# Altium PCB 9101带功放(AD).PcbDoc
Units mil, origin at the board's own origin, x right, y up, seen from the top; angles counter-clockwise.
Board outline 938 x 850 mil, 2 copper layers (Top Layer, Bottom Layer); 20 components, 24 nets, 94 pads, 23 vias.
Unrouted connection lines stored in the file: 2.
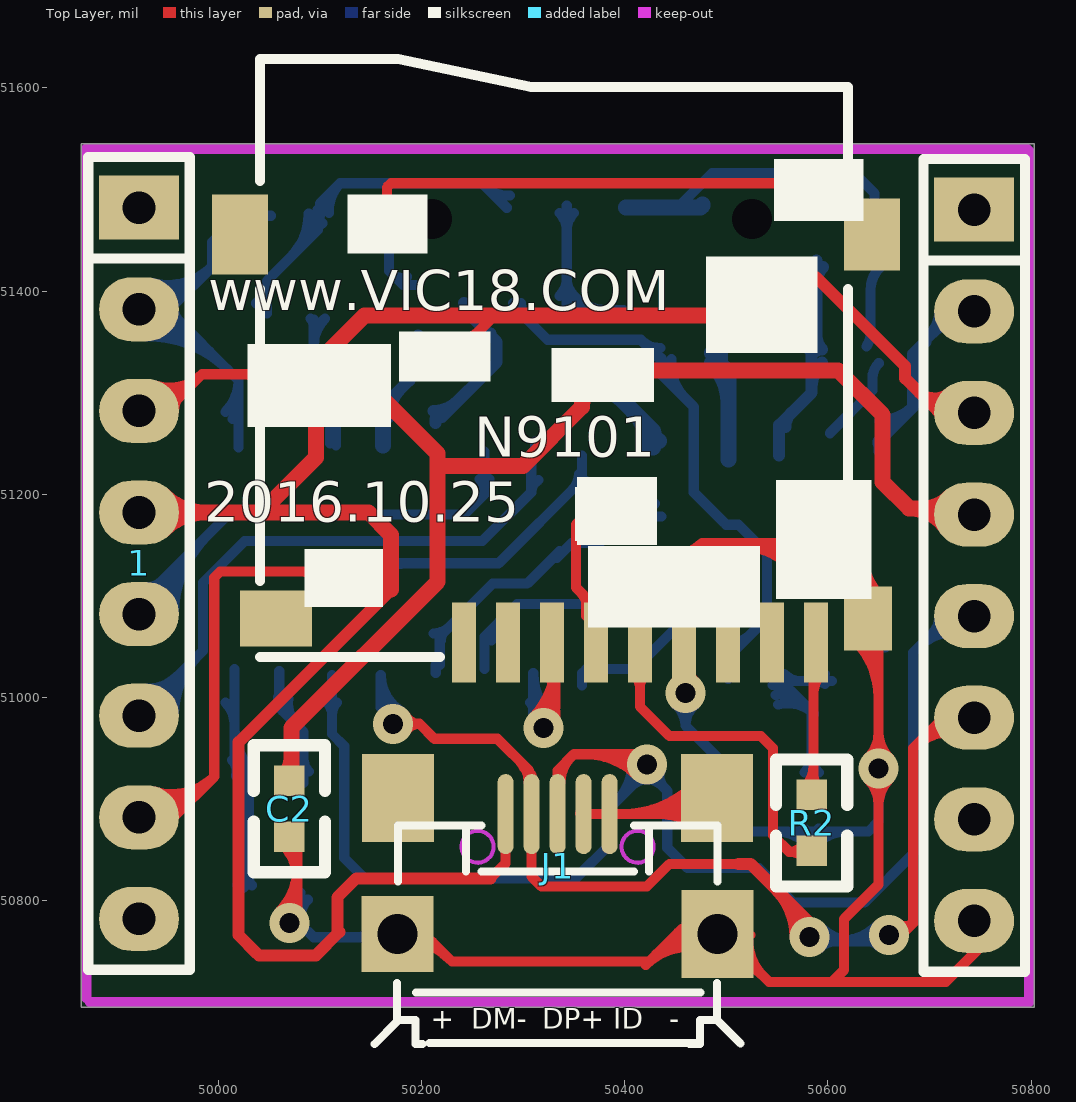
[diagram p0: Top Layer view]
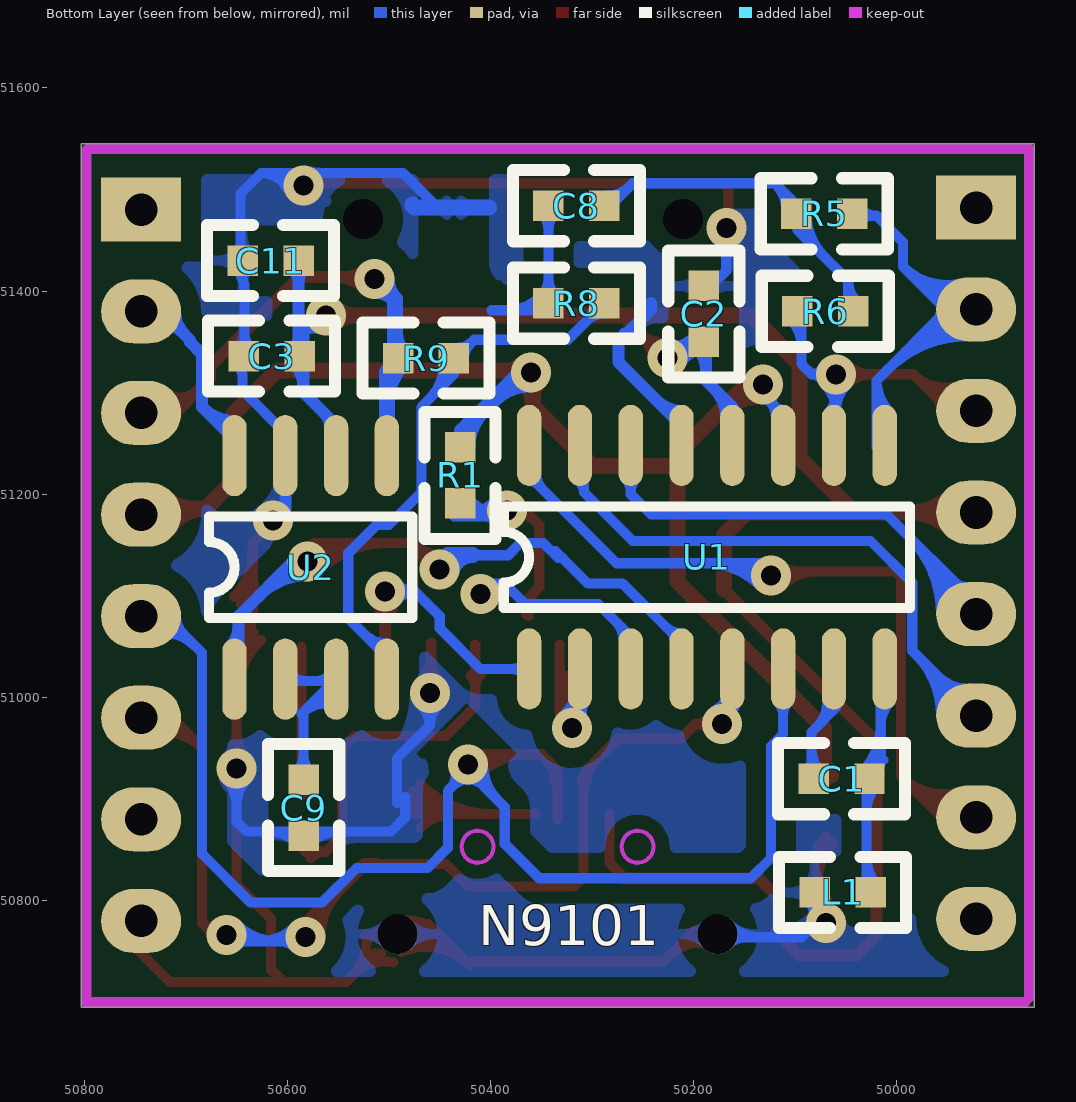
[diagram p1: Bottom Layer view, seen from below]

## Layer stack, top to bottom
Top Layer: signal copper 1.4
Dielectric: dielectric 12.6, FR-4, Dk 4.8
Bottom Layer: signal copper 1.4

## Board outline
49865,50695 50803,50695 50803,51545 49865,51545

## Design rules (kind name [scope] priority, off if disabled: settings)
Clearance [All] p1: gap=7.87
PolygonConnect [All] p1: connectstyle=Relief reliefconductorwidth=10 reliefentries=4 polygonreliefangle="90 Angle"
RoutingPriority [All] p1: routingpriority=1
RoutingVias [All] p1: holewidth=20 width=50 viastyle="Through Hole" minholewidth=28 minwidth=50 maxholewidth=28 maxwidth=50
SilkscreenOverComponentPads [All] p1: minsilkscreentomaskgap=10
SolderMaskExpansion [All] p1: expansion=4
Width [All] p1: maxlimit=78.74 minlimit=78.74 preferedwidth=10
26 further rules are at their usual default settings.

## Components (designator, comment, footprint, x,y, rotation, side; value= is the part's Value field where it differs from the comment)
1 "" SIP8#1 49922,51482 r270 top locked
C1 "104" 0603 50082,50920 r180 bottom
C2 "105" 0603 50190,51350 r90 bottom
C2 "105" 0603 50070,50918 r270 top
C3 "105" 0603 50588,51336 r0 bottom
C8 "105" 0603 50288,51484 r0 bottom
C9 "105" 0603 50584,50864 r90 bottom
C11 "104" 0603 50644,51430 r180 bottom
J1 "USB" USB-ANZUO 50334,50834 r180 top locked
L1 "100M600R" 0603 50026,50808 r0 bottom
R1 "4R7" 0603 50430,51246 r270 bottom
R2 "3K3" 0603 50584,50904 r270 top
R5 "4K7" 0603 50044,51476 r0 bottom
R6 "4K7" 0603 50098,51380 r180 bottom
R8 "4K7" 0603 50288,51388 r0 bottom
R9 "22k" 0603 50436,51334 r0 bottom
U1 "" SO-16 50362,51028 r90 bottom
U2 "8002" SO-8 50652,51018 r90 bottom
? "" SIP8#2 50744,51480 r270 top locked
? "TF" SD_TF 49928,51828 r180 top locked

## Footprints (in the part's own frame and the unit in brackets; to place one, negate y for a bottom-side part, rotate by r counter-clockwise, add the part's x,y. Pads: shape width x height; smd on the part's side, far side on the other; paste and mask are expansions set on the pad)
0603 [mil]
  rect 30x30 smd: 1(0,0) 2(55,0)
  silkscreen extent -35,-35 90,35
SD_TF [mm]
  rect 1.4x1.8 smd: 1(-18.169,9.459)
  rect 1.4x2 smd: 2(-2.369,9.459)
  rect 1.2x1.6 smd: 3(-18.069,19.059)
  rect 1.8x1.4 smd: 4(-3.269,19.059)
  rect 0.6x2 smd: 5(-16.769,19.659) 6(-15.669,19.659) 7(-14.569,19.659) 8(-13.469,19.659) 9(-12.369,19.659) 10(-11.269,19.659) 11(-10.169,19.659) 12(-9.069,19.659) 13(-7.969,19.659)
  round 0 hole 1: 14(-15.175,9.073) 15(-7.175,9.073)
  silkscreen extent -17.57,5.07 -2.87,20.02
SIP8#1 [mm]
  rect 1.6x2 hole 0.813: 1(0,0)
  oval 1.6x2 hole 0.813: 2(2.54,0) 3(5.08,0) 4(7.62,0) 5(10.16,0) 6(12.7,0) 7(15.24,0) 8(17.78,0)
  silkscreen extent -1.27,-1.27 19.05,1.27
SIP8#2 [mm]
  oval 1.6x2 hole 0.813: 16(17.78,0) 17(15.24,0) 18(12.7,0) 19(10.16,0) 20(7.62,0) 21(5.08,0) 22(2.54,0)
  rect 1.6x2 hole 0.813: 23(0,0)
  silkscreen extent -1.27,-1.27 19.05,1.27
SO-8 [mil]
  oval 80x24 smd: 1(0,0) 2(0,-50) 3(0,-100) 4(0,-150) 5(220,-150) 6(220,-100) 7(220,-50) 8(220,0)
  silkscreen extent 60,-175 160,25
SO-16 [mil]
  oval 80x24 smd: 1(0,0) 2(0,-50) 3(0,-100) 4(0,-150) 5(0,-200) 6(0,-250) 7(0,-300) 8(0,-350) 9(220,-350) 10(220,-300) 11(220,-250) 12(220,-200) 13(220,-150) 14(220,-100) 15(220,-50) 16(220,0)
  silkscreen extent 60,-375 160,25
USB-ANZUO [mm]
  rect 1.8x2.2 smd: 0(-4,1.702) 0(-3.981,-1.702) 0(3.995,-1.702)
  rect 1.8x1.9 smd: 0(4,1.702)
  round 1 hole 1: 1(-4,1.702) 2(4,1.702)
  oval 0.4x2 smd: 1(-1.3,-1.298) 2(-0.65,-1.298) 3(0,-1.298) 4(0.65,-1.298) 5(1.3,-1.298)
  Keep-Out Layer circle w0.102: c-2,-0.483 r0.4
  Keep-Out Layer circle w0.102: c2,-0.483 r0.4
  silkscreen extent -4.57,-1.01 4.57,4.45

## Via types
v1: diameter 39.37, hole 19.68, Top Layer to Bottom Layer, 23 vias

## Nets (pads, with @x,y where several pads share a name; then routed paths per layer and width w, separated by ;. In a path a pad name is that pad's centre, name@x,y a point inside that pad or via, vN(x,y) a via of type N, cw(c..) or ccw(c..) an arc to the next point about the centre after c; other vN are vias at no path point)
3.3V: ?.20 C2.1@50070,50918 R1.1 U1.11 | length 1807.7
  Top Layer w10: v1(50132,51308) v1@50135.79,51304.21 ; 50216,51228 50224,51228
  Top Layer w15.75: C2.1@50064.96,50923.04 ccw(c50047.97,50940.03) 50072,50940.03 ; C2.1@50072,50918 50072,50970 50216,51114 50216,51240 50151.79,51304.21 ; v1@50132,51296.19 cw(c50132,51229.05) 50179.48,51276.52 ; v1@50132,51311.94 cw(c50132,51282.81) 50152.59,51303.41 ; v1@50135.79,51304.21 50151.79,51304.21 ; v1@50138.63,51298.22 cw(c50147.99,51284.42) 50159.78,51296.21 ; v1@50140.35,51299.65 cw(c50151.37,51288.62) 50151.37,51304.21 ; v1@50143.48,51310.76 ccw(c50151.79,51312.75) 50151.79,51304.21 ; 50224,51228 50300,51228 50358,51286 v1@50358,51318 ; v1@50351.65,51311.65 cw(c50336.31,51296.31) 50358,51296.31 ; 50358,51286.66 cw(c50393.34,51286.66) 50368.35,51311.65 cw(c50393.34,51286.66) 50393.34,51322 ; v1@50364,51322 50610,51322 50654,51278 50654,51212 50680,51186 ; v1@50368.35,51328.35 ccw(c50383.68,51343.68) 50383.68,51322 ; 50693.58,51186 ccw(c50693.58,51222.54) ?.20@50719.42,51196.7 ; ?.20@50716.62,51166.67 ccw(c50680,51141.64) 50680,51186 ; ?.20@50744,51186 50680,51186
  Bottom Layer w10: U1.11@50110,51250 U1.11@50110,51264 ; U1.11@50112,51283 ccw(c50112,51295.07) 50120.54,51286.54 ; U1.11@50116,51248 50116,51282 v1@50136,51302 ; U1.11@50119,51276 cw(c50140.73,51276) v1@50125.36,51291.36 ; 50121,51287 ccw(c50115.37,51292.63) v1@50121.22,51298.03 ; v1@50368,51320 v1@50370,51320
  Bottom Layer w15.75: v1@50360,51308.19 cw(c50360,51255.53) 50397.23,51292.77 ; v1@50362,51322 50368,51322 50428,51262 ; 50407.93,51282.06 cw(c50371.87,51246) R1.1@50422.87,51246 ; 50421,51269 cw(c50409.39,51257.39) R1.1@50423.76,51249.45 ; R1.1@50428,51246 50428,51262 ; R1.1@50433.63,51252.13 cw(c50439.46,51262) 50428,51262
  other v1: 50360,51320
AGND: C1.2 L1.1 U1.8 | length 428.5
  Bottom Layer w10: U1.8@50007.05,50995.05 cw(c49985.44,50973.44) 50016,50973.44 ; 50013.5,50938.5 cw(c50002.41,50927.41) C1.2@50017.42,50922.89 ; 50016,50946.56 ccw(c50053.56,50946.56) C1.2 ; 50016,50970.7 ccw(c50077.7,50970.7) C1.2@50034.07,50927.07 ; U1.8@50016,51028 50016,50936 50030,50922 50030,50818 L1.1@50024,50812 ; C1.2@50018.46,50933.54 ccw(c50027,50942.07) C1.2@50027,50930 ; L1.1@50018.93,50815.07 ccw(c49992.2,50841.8) 50030,50841.8 ; C1.2@50019.93,50912.93 cw(c49995.61,50888.61) 50030,50888.61 ; L1.1@50030,50822.49 ccw(c50040.49,50822.49) L1.1@50033.07,50815.07 ; 50030,50903.1 cw(c50043.9,50903.1) C1.2@50034.07,50912.93
DACL: 1.2 R5.1 U1.9 | length 827.4
  Bottom Layer w10: 1.2 49950,51382 50020,51312 ; 1.2@49926,51386 49956,51386 49994,51424 ; 1.2@49929.87,51355.5 cw(c49929.87,51242.95) 50009.46,51322.54 ; 1.2@49929.87,51365.5 cw(c49929.87,51277.09) 49992.39,51339.61 ; 1.2@49929.87,51375.5 cw(c49929.87,51311.23) 49975.32,51356.68 ; 1.2@49931.41,51388.31 ccw(c49940.76,51426.87) 49968.81,51398.82 ; 1.2@49933.76,51398.03 ccw(c49945.68,51447.14) 49981.41,51411.41 ; 1.2@49936.12,51407.75 ccw(c49950.59,51467.4) 49994,51424 ; 1.2@49956.37,51382 ccw(c49971.75,51382) 49960.87,51371.13 ; U1.9@50007.07,51280.97 ccw(c49976.3,51312) 50020,51312 ; U1.9@50014.11,51273.87 ccw(c50000.1,51288) 50020,51288 ; U1.9@50020,51246 50020,51312 ; 50024.69,51474 cw(c50024.69,51456.69) R5.1@50036.93,51468.93 ; R5.1@50036,51482 cw(c50020,51494) 50020,51474 ; R5.1@50052,51474 50020,51474 ; 49994,51424 49994,51448 50020,51474
DACR: 1.3 R6.1 U1.10 | length 622.2
  Top Layer w10: 1.3 49948,51282 49984,51318 ; 1.3@49931.92,51288.17 ccw(c49940.9,51315.25) 49961.07,51295.07 ; 1.3@49935.06,51297.66 ccw(c49946.6,51332.47) 49972.54,51306.54 ; 1.3@49938.21,51307.15 ccw(c49952.31,51349.68) 49984,51318 ; 1.3@49956.37,51282 cw(c49976.58,51282) 49962.29,51296.29 ; v1@50049.62,51307.62 ccw(c50024.55,51282.55) 50024.55,51318 ccw(c50024.55,51353.45) v1@50049.62,51328.38 ; v1(50060,51318) 49984,51318
  Bottom Layer w10: v1@50049.62,51307.62 cw(c50024.55,51282.55) 50060,51282.55 cw(c50095.45,51282.55) v1@50070.38,51307.62 ; U1.10@50057.05,51280.95 ccw(c50049.93,51288.07) 50060,51288.07 ; U1.10@50060,51272 v1@50060,51316 ; 50060,51297.73 ccw(c50083.73,51297.73) U1.10@50066.95,51280.95 ; v1(50060,51318) 50084,51318 ; v1@50062,51314 v1@50064,51316 ; v1@50073.08,51311.32 cw(c50084,51305.73) 50084,51318 ; v1@50073.08,51324.68 ccw(c50084,51330.27) 50084,51318 ; R6.1@50090.93,51372.93 cw(c50083.51,51365.51) R6.1@50094,51365.51 ; 50094,51346.2 cw(c50131.8,51346.2) R6.1@50105.07,51372.93 ; R6.1@50094,51372 50094,51328 50084,51318
GND: ?.3 ?.8 ?.16 C2.2 C3.2 C9.1 C11.1 J1.0@50176.52,50767 J1.0@50490.72,50901 J1.0@50491.48,50767 J1.1 J1.2 L1.2 U1.13 U2.7 | length 4989.9
  Top Layer w10: v1@50059.62,50788.38 ccw(c50015.23,50832.77) 50078,50832.77 ; C2.2@50062.93,50855.93 cw(c50026.54,50819.54) 50078,50819.54 ; v1@50066.69,50781.31 ccw(c50039.38,50808.62) 50078,50808.62 ; C2.2@50068,50860 50072,50860 50078,50854 v1@50078,50780 ; C2.2@50070,50863 cw(c50050.69,50843.69) 50078,50843.69 ; v1@50166,51464 50166,51502 50170,51506 v1@50582,51506 ; J1.0@50174,50770 J1.0@50200,50770 ; J1.0@50176.27,50772.31 cw(c50178.43,50725.99) J1.0@50211.22,50758.78 ; J1.0@50176.68,50764.64 cw(c50189.26,50734.3) 50212.48,50757.52 ; J1.0@50176.74,50762.32 cw(c50179.85,50695.4) 50227.23,50742.77 ; J1.0@50180.51,50755.4 cw(c50195.46,50719.34) 50223.06,50746.94 ; J1.0@50188.24,50775.86 ccw(c50200,50784.74) J1.0@50200,50770 ; J1.0@50190.63,50762.95 cw(c50200,50760.25) J1.0@50200,50770 ; J1.2@50356,50886 J1.2@50356.87,50886 ; J1.2@50364,50885.11 J1.1@50392,50885.11 ; J1.1@50385.18,50885.11 50475.11,50885.11 J1.0@50488,50898 ; 50397.92,50885.11 ccw(c50397.92,50985.93) J1.0@50469.2,50914.64 ; 50420.71,50736.71 cw(c50463.51,50693.91) J1.0@50487.37,50749.54 ; 50422.06,50885.11 ccw(c50422.06,50961.78) J1.0@50476.27,50907.57 ; 50431.15,50747.15 cw(c50469.78,50708.52) J1.0@50491.31,50758.73 ; 50436.58,50885.11 cw(c50436.58,50838.98) J1.0@50469.2,50871.6 ; 50441.59,50757.59 cw(c50476.05,50723.14) J1.0@50495.25,50767.92 ; 50446.2,50885.11 ccw(c50446.2,50937.64) J1.0@50483.35,50900.5 ; v1@50449.42,51014.57 ccw(c50428.04,51035.96) ?.8@50458.28,51035.96 ; 50452.04,50768.04 cw(c50482.32,50737.76) J1.0@50499.19,50777.11 ; ?.8@50453.47,51021.66 cw(c50441.84,51010.03) 50458.28,51010.03 cw(c50474.73,51010.03) ?.8@50463.1,51021.66 ; ?.8@50458.28,51043.33 ccw(c50498.94,51043.33) v1@50470.19,51014.58 ; ?.8 50458.28,51005.72 v1@50464,51000 ; J1.0@50461.11,50776.79 cw(c50456,50777.12) 50456,50772 ; J1.0@50461.99,50767.34 ccw(c50456,50765.81) 50456,50772 ; J1.0@50468.09,50772 ccw(c50468.09,50790.39) J1.0@50481.1,50777.39 ; J1.0@50479.02,50759.23 ccw(c50456,50744.86) 50456,50772 ; J1.0@50488,50772 50456,50772 ; J1.0@50495.6,50739.12 cw(c50504.24,50697.11) 50534.57,50727.43 ; J1.0@50500,50766 J1.0@50524,50766 ; J1.0@50501.98,50756.74 cw(c50524,50735.2) J1.0@50524,50766 ; J1.0@50502.98,50776.14 ccw(c50524,50792.86) J1.0@50524,50766 ; J1.0@50508,50748 50514,50748 50542,50720 50716,50720 50746,50750 50746,50778 ?.16@50748,50780 ; J1.0@50521.91,50759.13 ccw(c50567.89,50759.13) 50535.38,50726.62 ; 50604,50720 50616,50732 50616,50782 50650,50816 v1(50650,50930) ; v1@50616,51174 50616,51170 50634,51152 ?.3@50634,51080 ; ?.3@50626.22,51056.61 cw(c50568.8,50999.2) 50650,50999.2 ; ?.3@50626.22,51098.7 ccw(c50607.43,51117.48) 50634,51117.48 ; ?.3@50633.29,51063.68 cw(c50592.95,51023.34) 50650,51023.34 ; 50634,51119.35 ccw(c50673.2,51119.35) ?.3@50645.48,51091.62 ; 50634,51143.49 ccw(c50697.35,51143.49) ?.3@50652.55,51098.7 ; ?.3@50636,51078 50636,51066 50650,51052 v1@50650,50940 ; v1@50639.62,50919.62 cw(c50614.55,50894.55) 50650,50894.55 cw(c50685.45,50894.55) v1@50660.38,50919.62 ; v1@50639.62,50940.38 ccw(c50614.55,50965.45) 50650,50965.45 ccw(c50685.45,50965.45) v1@50660.38,50940.38 ; ?.3@50640.36,51070.75 cw(c50617.09,51047.48) ?.3@50650,51047.48 ; J1.0@50200,50770 50230,50740 50424,50740 50456,50772
  Bottom Layer w10: v1@50067.74,50792.51 ccw(c50065.32,50808) L1.2 50081,50777 50094,50764 50174,50764 J1.2@50176,50762 ; v1@50069.28,50782.63 ccw(c50067.14,50796.32) L1.2@50081,50796.32 ; L1.2@50073.93,50800.93 cw(c50056.86,50783.86) 50081,50783.86 cw(c50105.14,50783.86) L1.2@50088.07,50800.93 ; 50133.81,50764 ccw(c50133.81,50809.71) J1.2@50166.13,50777.39 ; 50148.32,50764 cw(c50148.32,50738.81) J1.2@50166.13,50756.62 ; v1(50168,51462) 50168,51420 50182,51406 C2.2@50194,51406 ; 50171.5,51416.5 ccw(c50180.36,51425.36) C2.2@50185.72,51414.04 ; 50448.17,51482 cw(c50454,51474.5) 50454,51484 50486,51516 50626,51516 ; v1@50450.23,50993.06 cw(c50432.29,50972.19) 50459.81,50972.19 ; v1(50459.81,51004.19) 50459.81,50972.19 ; v1@50469.39,50993.06 ccw(c50487.33,50972.19) 50459.81,50972.19 ; 50484,50902 50484,50882 50498,50868 50640,50868 50650,50878 v1(50650,50930) ; 50492,50896 50492,50940 50459.81,50972.19 ; 50550.2,50868 cw(c50550.2,50830.2) C9.1@50576.93,50856.93 ; C9.1@50569.51,50868 ccw(c50569.51,50878.49) C9.1@50576.93,50871.07 ; C9.1@50591.07,50856.93 cw(c50617.8,50830.2) 50617.8,50868 ; C9.1@50591.07,50871.07 ccw(c50598.49,50878.49) C9.1@50598.49,50868 ; v1@50599.7,51502 cw(c50626,51484.29) v1@50601.19,51504.04 ; U2.7@50602,51260 50644,51302 50644,51314.27 cw(c50664.73,51314.27) C3.2@50650.07,51328.93 ; v1@50602.1,51505.13 cw(c50626,51484.29) 50603.39,51506.52 cw(c50626,51484.29) 50626,51516 ; C3.2@50638,51345.49 ccw(c50621.27,51357.73) 50641.6,51353.66 ; v1@50639.62,50919.62 cw(c50614.55,50894.55) 50650,50894.55 cw(c50685.45,50894.55) v1@50660.38,50919.62 ; 50642,51352.82 50642,51401.03 cw(c50672.97,51401.03) C11.1@50651.07,51422.93 ; C11.1@50646,51441.64 50646,51496 50626,51516
  Bottom Layer w11.81: U1.13@50212,51282.09 ccw(c50212,51316.12) 50236.06,51292.06 ; U1.13@50214,51270 50214,51274 U1.13@50218,51278 ; U1.13@50220,51276 50274,51330 50274,51350 50242,51382 50242,51388 ; 50268,51356 50268,51358 ; v1@50585.89,51502 v1@50599.7,51502 ; v1@50601.19,51504.04 cw(c50608,51514.36) 50599.01,51505.88 cw(c50596.24,51487.57) v1@50602.1,51505.13 ; U2.7@50602,51207.72 50602,51186 v1(50614,51174)
  Bottom Layer w15.75: 50401.32,51482 50474.65,51482 50476.65,51484 50476.65,51485
  other v1: 50070,50778 50584,51504
MCU_1LINE: 1.7 U1.16 | length 1095.1
  Top Layer w10: 1.7@49924,50882 49956,50882 49996,50922 ; 1.7@49931.76,50888.22 ccw(c49943.58,50927.21) 49972.4,50898.4 ; 1.7@49934.66,50897.79 ccw(c49949.07,50945.32) 49984.2,50910.2 ; 1.7@49937.56,50907.36 ccw(c49954.56,50963.43) 49996,50922 ; 50078.89,51124 cw(c50078.89,51074.89) v1@50113.62,51109.62 ; 50098.2,51124 ccw(c50098.2,51145.79) v1@50113.62,51130.38 ; 50103.03,51124 cw(c50103.03,51099.03) v1@50120.69,51116.69 ; v1@50124,51124 50002,51124 49996,51118 49996,50922
  Bottom Layer w10: v1@50120.24,51123.76 cw(c50140.14,51103.86) 50140.14,51132 ; v1@50126,51122 50136,51132 50276,51132 50358,51214 U1.16@50358,51238 ; v1@50127.31,51116.69 cw(c50164.28,51079.72) 50164.28,51132 ; v1@50134.38,51109.62 cw(c50188.42,51055.58) 50188.42,51132 ; 50348.64,51204.64 ccw(c50333.27,51220) U1.16@50355,51220 ; 50353.46,51209.46 cw(c50362,51200.93) U1.16@50362,51213
  other v1: 50124,51120
MUTE: U1.4 U2.1 | length 1030.5
  Top Layer w10: v1@50446,51132 50456,51132 50476,51152 50574,51152 v1@50576,51150 ; v1@50450,51140.69 ccw(c50450,51176.14) 50475.07,51151.07 ccw(c50500.14,51126) v1@50464.69,51126 ; 50501.09,51152 cw(c50501.09,51055.09) v1@50569.62,51123.62 ; 50525.23,51152 cw(c50525.23,51079.23) v1@50576.69,51130.69 ; 50549.38,51152 cw(c50549.38,51103.38) v1@50583.76,51137.76
  Bottom Layer w10: U1.4@50212,51063 ccw(c50212,51084.73) 50227.36,51069.36 ; U1.4@50214,51024 U1.4@50214,51032 ; U1.4@50218,51032 50218,51060 50270,51112 50304,51112 50336,51144 ; U1.4@50219,51056 cw(c50231.07,51056) 50222.54,51064.54 ; 50329.42,51137.42 50333.42,51137.42 50348,51152 ; 50332.23,51140.23 50334.23,51140.23 ; 50352,51152 50370.62,51152 50382.62,51140 50436,51140
  Bottom Layer w11.81: v1@50578,51136 50592,51136 50648,51080 U2.1@50648,51020 ; v1@50580,51120.22 cw(c50580,51053.15) 50627.42,51100.58 ; v1@50580,51132.03 cw(c50580,51093.48) 50607.26,51120.74 ; 50648,51070.37 ccw(c50676.37,51070.37) U2.1@50656.31,51050.31
  Bottom Layer w15.75: v1@50438.46,51123.5 ccw(c50418,51119.07) 50418,51140 50442,51140 50448,51134 v1@50448,51120
  other v1: 50450,51126 50580,51134
NetC1_1: C1.1 U1.7 | length 202.9
  Bottom Layer w10: U1.7@50059.03,51000.41 ccw(c50075.68,50998.1) 50063.79,50986.21 ; U1.7@50060,51026 50060,50990 50084,50966 C1.1@50084,50916 ; U1.7@50068.93,50999.03 ccw(c50100.62,50994.62) 50078,50972 ; C1.1@50074.93,50927.07 ccw(c50053.03,50948.97) 50084,50948.97 ; 50084,50939.31 ccw(c50101.31,50939.31) C1.1@50089.07,50927.07
NetC9_2: C9.2 U2.2 U2.3 | length 332.5
  Bottom Layer w10: U2.3@50545.56,51012.08 cw(c50550.27,50995.92) U2.3@50562.18,51007.82 ; U2.3@50548.36,51002.48 cw(c50555.67,50977.43) 50574.12,50995.88 ; U2.3@50551.16,50992.88 cw(c50561.06,50958.94) 50586.06,50983.94 ; U2.3@50554.68,51007.32 U2.3@50554.68,51008.68 ; U2.3@50556.95,51013.05 cw(c50564.07,51005.93) 50564.07,51016 ; U2.3@50556.95,51022.95 ccw(c50573.73,51039.73) 50573.73,51016 ; C9.2@50576.93,50926.07 ccw(c50559.86,50943.14) 50584,50943.14 ccw(c50608.14,50943.14) C9.2@50591.07,50926.07 ; 50580.27,51016 ccw(c50580.27,51039.73) U2.2@50597.05,51022.95 ; C9.2@50584,50926 50584,50986 50564,51006 50552,51006 50562,51016 U2.2@50604,51016 ; 50589.93,51016 cw(c50589.93,51005.93) U2.2@50597.05,51013.05
NetR5_2: C8.1 R5.2 R6.2 | length 530.8
  Bottom Layer w10: R6.2@50037,51388 ccw(c50020.5,51410) 50048,51410 ; R6.2@50048,51378 50048,51410 ; 50071.32,51433.32 ccw(c50028.64,51476) R5.2@50089,51476 ; 50088.39,51450.39 ccw(c50062.79,51476) R5.2 cw(c50117.59,51477.24) R5.2@50104.42,51490.42 ; R5.2@50093.79,51467.46 cw(c50089.22,51459.97) 50098,51459.97 cw(c50105.18,51459.97) R5.2@50102.6,51466.67 ; R5.2@50098,51480 50098,51460 50048,51410 ; R5.2@50100,51474 50100,51486 50120,51506 ; R5.2@50108.98,51476.66 cw(c50146.81,51479.19) 50120,51506 ; 50263,51503 ccw(c50284.99,51524.99) C8.1@50287.27,51493.97 ; C8.1@50284,51482 50260,51506 50120,51506
NetR8_1: R8.1 R9.1 U2.4 | length 759.8
  Bottom Layer w10: R8.1@50288,51378 cw(c50288,51353.86) 50305.07,51370.93 cw(c50322.14,51388) R8.1@50298,51388 ; R8.1@50290,51380 R8.1@50290,51388 ; R8.1@50292,51388 50292,51384 50324,51352 50416,51352 R9.1@50436,51332 ; 50417,51351 ccw(c50434.04,51368.03) R9.1@50435.42,51343.98 ; 50420.34,51347.66 cw(c50406.69,51334) R9.1@50426,51334 ; 50444.99,51309.01 cw(c50467.02,51331.05) R9.1 50436,51318 ; R9.1@50445.95,51333.05 ccw(c50494.43,51328.43) 50460,51294 ; 50498,51172 50468,51202 50468,51286 50436,51318 ; 50500,51170 50512,51170 50540,51142 50540,51078 50502,51040 U2.4 ; U2.4@50502,51053 ccw(c50502,51084.38) 50524.19,51062.19 ; 50436,51318 cw(c50443.8,51318) 50440.38,51325.01 ccw(c50443.8,51318) 50436,51318 ; 50436,51318 ccw(c50428.2,51318) 50431.62,51325.01 cw(c50428.2,51318) 50436,51318
NetR8_2: C8.2 R8.2 | length 292.8
  Bottom Layer w10: R8.2@50335.93,51395.07 ccw(c50318.86,51412.14) 50343,51412.14 ccw(c50367.14,51412.14) 50350.07,51395.07 ccw(c50384.04,51429.04) 50384.04,51381 ; C8.2@50335.93,51476.93 cw(c50318.86,51459.86) 50343,51459.86 cw(c50367.14,51459.86) C8.2@50350.07,51476.93 ; R8.2@50342,51380 R8.2@50343,51381 ; R8.2 ccw(c50359.9,51404.9) 50359.9,51381 ; C8.2 R8.2@50343,51381 ; 50399,51381 R8.2@50343,51381
NetSD1_4: ?.10 R1.2 | length 431.9
  Top Layer w10: 50354.67,51172.67 cw(c50374.29,51153.05) v1@50382.6,51179.53 ; 50354.99,51105.41 cw(c50331.17,51081.59) ?.10@50364.86,51081.59 ; 50358.43,51101.97 cw(c50342.21,51085.75) ?.10@50364.92,51082.54 ; ?.10@50362,51080 50362,51098.4 ; ?.10@50371.8,51088.4 cw(c50372,51098.4) 50362,51098.4 ; v1@50382,51188 50370,51188 50352,51170 50352,51108.4 50362,51098.4
  Bottom Layer w10: v1@50387.31,51187.31 ccw(c50409.79,51209.79) 50409.79,51178 ; v1@50394.38,51173.62 cw(c50404.97,51163.03) 50404.97,51178 ; v1@50394.38,51194.38 ccw(c50433.94,51233.94) R1.2@50433.94,51178 ; 50404,51178 ccw(c50404,51210.5) R1.2 ; R1.2@50422,51197 cw(c50384,51225.5) 50384,51178 R1.2@50436,51178
  other v1: 50384,51184
NetSD1_9: ?.5 R2.1 | length 203.6
  Top Layer w10: R2.1@50576.93,50911.07 ccw(c50555.03,50932.97) 50586,50932.97 ; R2.1 50586,50906 ?.5@50586,51050 ; 50586,50923.31 ccw(c50603.31,50923.31) R2.1@50591.07,50911.07 ; 50586,51004.71 cw(c50609.97,51004.71) ?.5@50593.02,51021.66
SD_CLK: ?.9 R2.2 U1.3 | length 623.8
  Top Layer w10: ?.9@50410.16,51021.66 cw(c50398.53,51010.03) 50414.97,51010.03 cw(c50431.42,51010.03) ?.9@50419.79,51021.66 ; ?.9@50414.98,51052 50414.98,50991.02 50444,50962 50534,50962 50546,50950 50546,50864 50562,50848 ; 50562.27,50848 cw(c50562.27,50827.27) R2.2@50576.93,50841.93 ; R2.2@50576,50855 cw(c50562,50865.5) 50562,50848 ; R2.2@50583,50849 50582,50848 50562,50848
  Bottom Layer w10: U1.3 50262,51060 50294,51092 50366,51092 50386,51112 v1@50414,51112 ; U1.3@50269,51056 cw(c50295.56,51056) 50276.78,51074.78
  other v1: 50410,51102
SD_CMD: ?.11 U1.2 | length 430.2
  Top Layer w10: v1@50309.62,50980.38 ccw(c50255.58,51034.42) ?.11@50332,51034.42 ; v1@50316.69,50973.31 ccw(c50279.72,51010.28) 50332,51010.28 ; v1(50320,50970) 50320,50978 50332,50990 ; v1@50320,50984.68 ccw(c50320,51000.82) 50331.41,50989.41 ; ?.11@50323.54,51021.66 cw(c50303.14,51001.25) 50332,51001.25 ; v1@50323.76,50966.24 ccw(c50303.86,50986.14) 50332,50986.14 ; v1@50331.43,50979.22 cw(c50337.71,50984.29) 50332,50990 ; ?.11@50332,51052 50332,50990
  Bottom Layer w10: U1.2@50307.05,50995.05 cw(c50299.93,50987.93) 50310,50987.93 ; v1@50310,50978.27 cw(c50333.73,50978.27) U1.2@50316.95,50995.05 ; U1.2@50310,51002.12 ccw(c50347.79,51002.12) v1@50323.07,50973.54 ; v1@50326,50970 50318,50970 50310,50978 50310,51024 ccw(c50366.72,51024) v1@50329.61,50981.11
SD_DAT: ?.7 U1.1 | length 386.2
  Top Layer w11.81: v1@50494.26,51094.26 cw(c50470.73,51070.73) 50504,51070.73 cw(c50537.27,51070.73) v1@50513.74,51094.26 ; ?.7@50497.42,51085.77 ccw(c50481.52,51101.66) v1@50504,51101.66 ; v1(50504,51104) 50504,51052 ?.7@50506,51050
  Bottom Layer w10: U1.1@50358,51012 U1.1@50358,51024 ; U1.1 50410,51028 50450,51068 50450,51080 50474,51104 ; U1.1@50366.95,51023.05 cw(c50378.9,51011.1) 50378.9,51028 cw(c50378.9,51044.9) U1.1@50366.95,51032.95 ; v1@50492.4,51094.99 ccw(c50474,51080.7) 50474,51104 ; v1@50492.4,51113.01 cw(c50474,51127.3) 50474,51104 ; v1(50504,51104) 50474,51104
SPK1: ?.22 U2.8 | length 268.9
  Bottom Layer w10: U2.8@50650,51242 U2.8@50650,51252 ; ?.22@50736,51368 ?.22@50738,51370
  Bottom Layer w11.81: U2.8@50650,51250 50650,51252 50684,51286 50684,51338 50696,51350 50696,51352 50712,51368 ?.22@50734,51368 ; U2.8@50652,51272.09 ccw(c50652,51315.78) 50682.89,51284.89 ; 50701.01,51357.01 ccw(c50678.03,51380) ?.22@50710.54,51380 ; 50703.81,51359.81 cw(c50723.77,51339.85) ?.22@50732.07,51366.83
SPK2: ?.21 R9.2 U2.5 | length 720.8
  Top Layer w10: ?.21@50736,51276 ?.21@50756,51276
  Top Layer w11.81: v1@50516,51414 50588,51414 50676,51326 50676,51314 50708,51282 ?.21@50736,51282 ; v1@50523.74,51402.26 cw(c50552.1,51373.9) 50552.1,51414 ; v1@50523.74,51421.74 ccw(c50542.44,51440.44) 50542.44,51414 ; 50689.06,51300.94 ccw(c50705.1,51316.97) ?.21@50719.67,51299.6 ; 50698.18,51291.82 ccw(c50713.41,51307.06) ?.21@50727.27,51290.55
  Bottom Layer w15.75: R9.2@50485.96,51328.96 cw(c50447.24,51290.24) 50502,51290.24 ; R9.2@50485.96,51339.04 ccw(c50466.55,51358.45) 50494,51358.45 ; U2.5@50502,51234 50502,51320 50494,51328 50494,51392 ; v1@50502.19,51411.93 cw(c50474.23,51411.77) 50494,51392 ; v1@50513.93,51400.19 ccw(c50513.77,51372.23) 50494,51392 ; v1@50516,51414 50494,51392
  other v1: 50514,51412
UART_RX: 1.6 U1.15 | length 732.6
  Bottom Layer w10: 1.6@49924,50982 1.6 49922,50983 49985,51046 49985,51113 50026,51154 50260,51154 50308,51202 U1.15@50308,51240 ; 1.6@49929.87,51008.5 ccw(c49929.87,51051.04) 49959.96,51020.96 ; 1.6@49946.37,50982 cw(c50007.62,50982) 49964.31,51025.31 ; 1.6@49956.37,50982 cw(c50041.76,50982) 49981.38,51042.38 ; 50308,51201.56 cw(c50321.95,51201.56) U1.15@50315.32,51213.84 ; U1.15@50312,51240 U1.15@50312,51252
UART_TX: 1.5 U1.14 | length 670.3
  Bottom Layer w10: 1.5@49924,51086 49924,51094 50010,51180 50242,51180 50262,51200 U1.14@50262,51242 ; 1.5@49929.87,51108.5 ccw(c49929.87,51129.31) 49944.59,51114.59 ; 1.5@49936.37,51082 cw(c49995.2,51082) 49953.6,51123.6 ; 1.5@49946.37,51082 cw(c50029.35,51082) 49970.67,51140.67 ; 1.5@49956.37,51082 cw(c50063.49,51082) 49987.75,51157.74 ; U1.14@50257.05,51215.05 cw(c50245.1,51203.1) 50262,51203.1 cw(c50278.9,51203.1) U1.14@50266.95,51215.05
USB_DM: ?.18 J1.4 U1.5 | length 1498.1
  Top Layer w10: v1@50172,50976 50174,50974 50198,50974 ; v1@50184.58,50966.42 cw(c50198,50958.33) 50198,50974 ; v1@50184.58,50981.58 ccw(c50198,50989.67) 50198,50974 ; 50297.15,50936.84 cw(c50276.92,50916.61) J1.4@50305.53,50916.61 ; 50300.51,50931.49 cw(c50288.04,50919.02) J1.4@50305.55,50916.95 ; 50301.51,50932.49 cw(c50290.34,50921.32) J1.4@50305.63,50917.34 ; 50306,50928 50274.7,50959.3 50212.7,50959.3 50198,50974 ; J1.4@50309.62,50919.22 cw(c50313.67,50928) 50304,50928 ; J1.4@50309.97,50919.02 cw(c50317.07,50930) 50304,50930 50304,50928 ; 50512,50836 50444,50836 50422,50814 50318,50814 50308.41,50823.59 50308.41,50923.59 50304,50928 ; v1@50582,50774 v1@50588,50768 ; v1@50660,50770 50676,50770 50684,50778 ; v1@50669.36,50777.31 ccw(c50676.3,50785.69) 50684,50778 ; 50685.31,50951.31 cw(c50719.78,50916.84) ?.18@50731.99,50964.03 ; 50697.68,50963.68 cw(c50724.86,50936.49) ?.18@50734.5,50973.71 ; ?.18@50738,50976 50736,50974 50708,50974 50684,50950 50684,50778
  Top Layer w11.81: 50512,50836 50524,50836 50582,50778 v1@50582,50768 ; 50548.58,50811.42 cw(c50501.15,50764) v1@50568.22,50764 ; 50568.74,50791.26 cw(c50541.48,50764) v1@50580.03,50764
  Bottom Layer w10: U1.5@50160,50990 50160,51022 ccw(c50201.82,51022) v1@50179.75,50986.47 ; U1.5@50160,51004.01 ccw(c50190.65,51004.01) v1@50174.47,50977.98 ; v1@50578,50760 50650,50760 v1@50656,50766 ; v1@50585.31,50767.31 ccw(c50602.97,50784.97) 50602.97,50760 ; v1@50592.38,50753.62 cw(c50607.79,50738.2) 50607.79,50760 ; v1@50592.38,50774.38 ccw(c50627.11,50809.11) 50627.11,50760 ; 50610.06,50760 ccw(c50610.06,50815.94) v1@50649.62,50776.38 ; 50634.2,50760 ccw(c50634.2,50791.79) v1@50656.69,50769.31 ; 50639.03,50760 cw(c50639.03,50745.03) v1@50649.62,50755.62
  other v1: 50582,50764 50660,50766 50172,50974
USB_DP: ?.19 J1.3 U1.6 | length 1711.4
  Top Layer w10: J1.3@50334,50880 50334,50928 50350,50944 50414,50944 50422,50936 v1(50422,50934) ; J1.3@50336.87,50916.61 cw(c50371.31,50916.61) 50346.96,50940.96 ; 50362.4,50944 cw(c50362.4,50874.4) v1@50411.62,50923.62 ; 50386.55,50944 cw(c50386.55,50898.55) v1@50418.69,50930.69
  Bottom Layer w10: U1.6@50107.05,50995.05 cw(c50095.1,50983.1) 50112,50983.1 cw(c50128.9,50983.1) U1.6@50116.95,50995.05 ; U1.6@50112,51022 50112,50964 50124,50952 50124,50842 50144,50822 50352,50822 50386,50856 50386,50892 50428,50934 v1@50428,50936 ; 50392.69,50898.69 ccw(c50357.38,50934) v1@50407.32,50934 ; 50407.17,50913.17 cw(c50422,50898.35) 50422,50919.31 cw(c50422,50898.35) 50436.83,50913.17 ; 50409.76,50915.76 ccw(c50391.52,50934) v1@50417.31,50934 ; v1@50424,50932 50424,50926 50442,50908 50442,50852 50462,50832 50532,50832 50566,50798 50636,50798 50684,50846 50684,51044 50718,51078 ?.19@50740,51078 ; v1@50435.56,50928.36 ccw(c50450.25,50922.25) 50439,50911 ; 50689.69,51049.69 cw(c50725.21,51014.18) ?.19@50733.43,51063.73 ; 50702.3,51062.3 ccw(c50684.59,51080) ?.19@50709.63,51080 ; 50703.45,51063.45 cw(c50729.12,51037.77) ?.19@50735.06,51073.59
VCC: 1.4 C2.1@50190,51350 C3.1 C11.2 J1.5 U1.12 U2.6 | length 2708.7
  Top Layer w10: v1@50226,51330 50272,51376 ; v1@50226,51348.69 ccw(c50226,51393.79) 50257.9,51361.9 ; v1@50240.69,51334 cw(c50266.48,51334) 50248.24,51352.24 ; 50268,50822 50282.82,50836.82 J1.5
  Top Layer w11.81: 50038,50748 50020,50766 50020,50956 50170,51106 ; 50040,50746 50096,50746 50119.18,50769.18 ; 50117.18,50771.18 50117.18,50803.18 50136,50822 50268,50822
  Top Layer w15.75: 1.4@49928,51182 50148,51182 50170,51160 50170,51106 ; 1.4@49946.58,51165.3 cw(c49986.9,51124.97) 49986.9,51182 cw(c49986.9,51239.03) 1.4@49946.58,51198.7 ; 50042,51182 50096,51236 50096,51297.29 50096,51328 50144,51376 v1@50560,51376 ; v1@50553.65,51367.65 ccw(c50533.49,51347.49) 50533.49,51376 ccw(c50533.49,51404.51) v1@50553.65,51384.35
  Bottom Layer w11.81: U1.12@50162,51271.5 50162,51286 50188,51312 C2.1@50188,51346 ; U1.12@50168.09,51276 cw(c50206.95,51276) 50179.48,51303.47 ; C2.1@50183.57,51343.57 cw(c50172.87,51332.87) 50188,51332.87 ; 50188,51323.21 cw(c50216.78,51323.21) C2.1@50196.43,51343.57 ; C2.1@50188.08,51348.08 ccw(c50202.75,51362.75) C2.1@50202.75,51342 ; C2.1@50196.43,51356.43 ccw(c50231.27,51391.27) v1@50231.27,51342 ; v1@50213.48,51328.24 ccw(c50192,51318.35) 50192,51342 v1@50234,51342 ; U2.6 50552,51268 50584,51300 50584,51362 ; U2.6@50558.1,51266 cw(c50577.64,51266) 50563.82,51279.82 ; v1(50562,51376) 50570,51376 50584,51362 ; v1@50566.48,51362.97 cw(c50573.26,51343.27) 50588,51358 ; v1@50575.78,51376 ccw(c50589.73,51376) 50579.87,51366.13 ; C3.1@50581.57,51342.43 ccw(c50563.63,51360.37) 50589,51360.37 ; C11.2@50582.57,51423.57 cw(c50567.04,51408.04) 50589,51408.04 cw(c50610.96,51408.04) C11.2@50595.43,51423.57 ; 50584,51304.39 cw(c50619.61,51304.39) C3.1@50594.43,51329.57 ; C3.1@50589,51341 C11.2 ; 50589,51355.54 ccw(c50607.54,51355.54) C3.1@50594.43,51342.43 ; C3.1@50593.41,51343.31 cw(c50607.26,51362) 50584,51362
  Bottom Layer w15.75: U1.12 U1.12@50162,51271.5
  other v1: 50226,51334
pads on no net: 1.1 1.8 ?.1 ?.2 ?.4 ?.6 ?.12 ?.13 ?.14 ?.15 ?.17 ?.23 J1.0@50176.72,50901

## Polygon pours and split planes (outlines as drawn)
GND on Top Layer "Top Layer-GND" (hatched 90Degree grid 8.19 track 11.93, remove dead copper, pour order 1000): 0,0
GND on Bottom Layer "Bottom Layer-GND" (hatched 90Degree grid 8.19 track 11.93, remove dead copper, pour order 1001): 0,0

## Keep-outs
Keep-Out Layer:
  lines w10: 49870,50704 49870,51540 50182,51540 50796,51540 ; 49874,50700 50798,50700 50798,51538

## Silkscreen, mask and mechanical layers (free items; w line width, h text height)
Top Overlay:
  rectangle: 50127,51437 50206,51495
  rectangle: 50559,51478 50620,51523
  rectangle: 50480,51339 50590,51434
  rectangle: 50328,51291 50429,51344
  rectangle: 50029,51266 50170,51348
  rectangle: 50178,51311 50268,51360
  rectangle: 50085,51089 50162,51146
  rectangle: 50351,51154 50419,51207
  rectangle: 50364,51069 50533,51149
  rectangle: 50549,51097 50643,51214
  rectangle: 50547,51469 50635,51530
  rectangle: 50353,51150 50432,51217
  text "www.VIC18.COM" at 49990,51381 h39.37
  text "N9101" at 50252,51237 h39.37
  text "2016.10.25" at 49986,51173 h39.37
Bottom Overlay:
  text "N9101" at 50412,50756 h39.37

## Text inside footprints (layer, text, board x,y; h text height)
J1: Top Overlay "+" at 50209,50673.89 h20; Top Overlay "DM-" at 50249,50673.89 h20; Top Overlay "DP+" at 50319,50673.89 h20; Top Overlay "ID" at 50389,50673.89 h20; Top Overlay "-" at 50444,50673.89 h20